# EAGLE board AirSensor_LoRA (EAGLE 9.6.2)
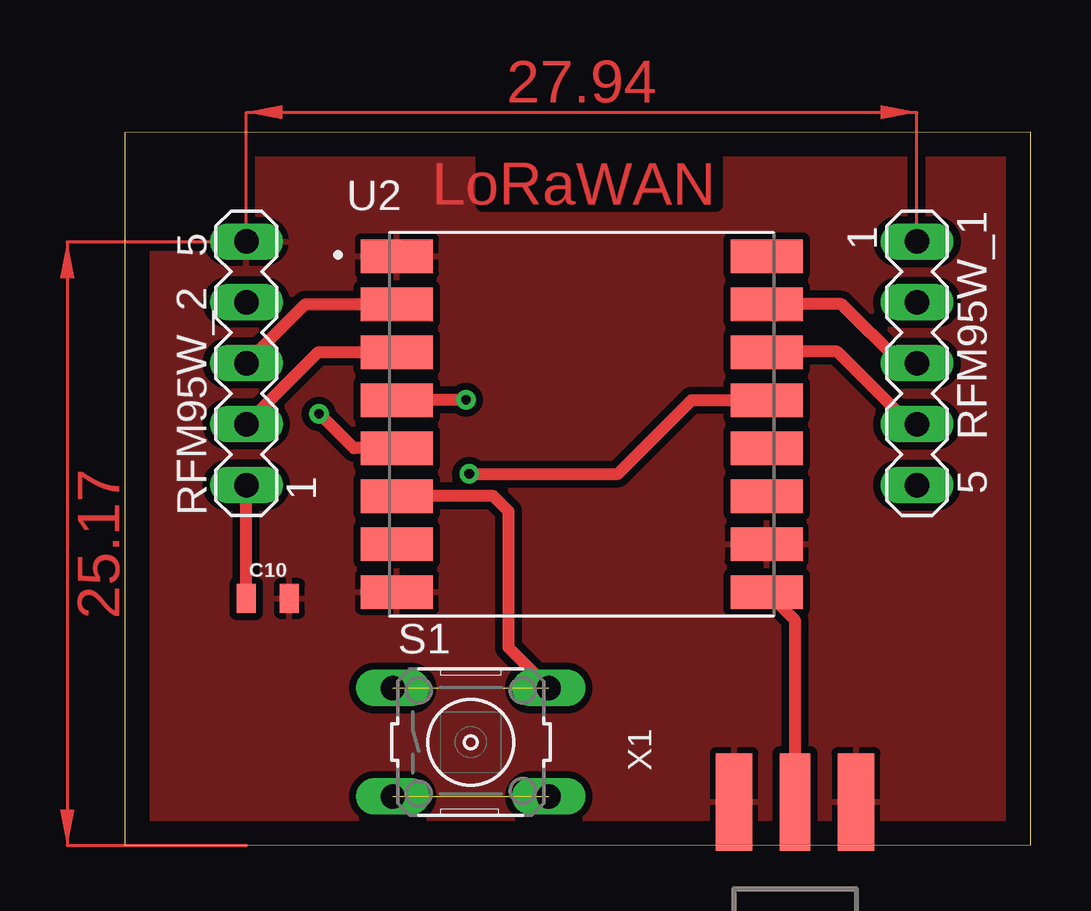
[diagram p0: board, top side]
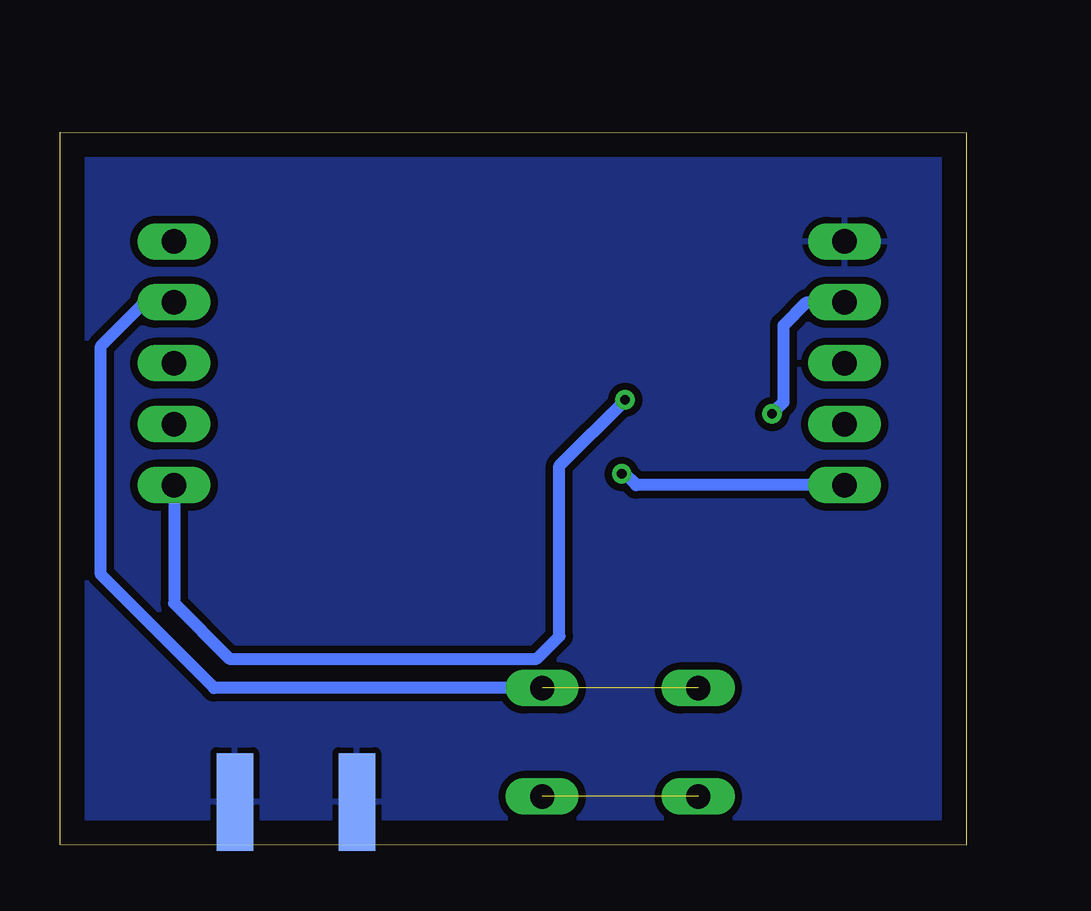
[diagram p1: board, bottom side, seen from below]

Size 37.77 x 29.73 mm. Coordinates in mm from the lower left corner, seen from the top.
Outline: 0,0 37.77,0.03 37.77,29.73 0,29.71 0,0
Copper layers (1*16): Top 0.035mm / dielectric 1.5mm / Bottom 0.035mm
Design rules "default": minimum track width 6mil, minimum drill 0.35mm, track to track 6mil, track to pad 6mil, pad to pad 6mil, via to via 6mil, smd to smd 6mil, copper to edge 40mil, drill to drill 6mil, minimum pad ring 10mil, minimum via ring 8mil, stop-mask expansion 4mil, vias tented up to drill 0mil, thermal gap 10mil

## Footprints (pad centres in the part's own frame; a part is rotated, then mirrored left to right if it is on the bottom)
0805 = smd 0.8 x 1.2: 1 -0.9,0; 2 0.9,0
MA05-1 = drill 1.016 long: 1 -5.08,0; 2 -2.54,0; 3 0,0; 4 2.54,0; 5 5.08,0
B3F-10XX = drill 1.016 long: 1 -3.251,2.261; 2 3.251,2.261; 3 -3.251,-2.261; 4 3.251,-2.261
XCVR_RFM95W-915S2 = smd 3 x 1.4: 1 -7.7,7; 2 -7.7,5; 3 -7.7,3; 4 -7.7,1; 5 -7.7,-1; 6 -7.7,-3; 7 -7.7,-5; 8 -7.7,-7; 9 7.7,-7; 10 7.7,-5; 11 7.7,-3; 12 7.7,-1; 13 7.7,1; 14 7.7,3; 15 7.7,5; 16 7.7,7
SMA_EDGELAUNCH = smd 4.064 x 1.524: GND@1 2.032,-2.54; GND@2 2.032,2.54 | smd 4.064 x 1.524 bottom: GND@3 2.032,2.54; GND@4 2.032,-2.54 | smd 4.064 x 1.27: P 2.032,0

## Placement (x,y rotation side)
C10  0.1uF  [0805]  5.97,10.29 0 top
RFM95W_1  LoRa_1  [MA05-1]  33.02,20.09 270 top
RFM95W_2  LoRa_2  [MA05-1]  5.08,20.09 90 top
S1  [B3F-10XX]  14.43,4.29 0 top
U2  RFM95W-915S2  [XCVR_RFM95W-915S2]  19.05,17.55 0 top
X1  [SMA_EDGELAUNCH]  27.94,-0.23 90 top

## Library data of the parts
C10 = SparkFun-Capacitors; PROD_ID: CAP-08064
RFM95W_1 RFM95W_2 = con-lstb; OC_FARNELL: unknown; OC_NEWARK: unknown
S1 = switch-omron; MPN: B3F-1000; OC_FARNELL: 176432; OC_NEWARK: 36M3542
U2 = RFM95W-915S2; AVAILABILITY: Warning; DESCRIPTION: General ISM < 1GHz LoRa™ Transceiver Module 915MHz Surface Mount; MF: RF Solutions; MP: RFM95W-915S2; PACKAGE: SMD-16 RF Solutions; PRICE: None; PURCHASE-URL: https://pricing.snapeda.com/search/part/RFM95W-915S2/?ref=eda
X1 = adafruit

## Nets
3.3V: S1.3 S1.4
GND: C10.2 RFM95W_2.5 U2.1 U2.8 U2.10 X1.GND@1 X1.GND@2 X1.GND@3 X1.GND@4
N$13: RFM95W_1.2 S1.1 S1.2 U2.6
N$17: C10.1 RFM95W_2.1 U2.13
N$18: RFM95W_2.2 U2.3
N$21: RFM95W_2.3 U2.2
N$22: RFM95W_2.4 U2.5
N$23: RFM95W_1.5 U2.4
N$24: RFM95W_1.4 U2.14
N$25: RFM95W_1.3 U2.15
N$26: U2.9 X1.P

## Tracks (layer width: path | path; a pad name or v marks a point on that pad's centre or on a via)
3.3V  (1 unrouted)
GND
  pour Top (isolate 0.305): 0.15,29.38 37.67,29.38 37.67,0.1 0.15,0.1
  pour Bottom (isolate 0.305): 0.28,29.39 37.67,29.39 37.67,0.1 0.28,0.1
N$13  (1 unrouted)
  Top 0.508: S1.2 16,8.23 16,13.92 15.37,14.55 U2.6
  Bottom 0.508: S1.2 31.34,6.55 36.07,11.28 36.07,20.8 34.24,22.63 RFM95W_1.2
N$17  (via drill 0.4)
  Top 0.508: C10.1 RFM95W_2.1 | v14.36,15.48 20.56,15.48 23.63,18.55 U2.13
  Bottom 0.508: RFM95W_2.1 13.77,15.01 14.3,15.54 v14.36,15.48
N$18
  Top 0.508: RFM95W_2.2 8.08,20.55 U2.3
N$21
  Top 0.508: RFM95W_2.3 7.54,22.55 U2.2
N$22  (via drill 0.4)
  Top 0.508: U2.5 9.56,16.55 8.13,17.98 v8.1,17.98
  Bottom 0.508: v8.1,17.98 7.62,18.47 7.62,21.67 6.66,22.63 RFM95W_2.4
N$23  (via drill 0.4)
  Top 0.508: v14.22,18.57 11.37,18.57 U2.4
  Bottom 0.508: RFM95W_1.5 33.02,10.08 30.71,7.77 17.91,7.77 16.97,8.71 16.97,15.82 v14.22,18.57
N$24
  Top 0.508: RFM95W_1.4 32.72,17.55 29.69,20.57 26.77,20.57 U2.14
N$25
  Top 0.508: RFM95W_1.3 32.33,20.09 29.87,22.56 U2.15
N$26
  Top 0.508: X1.P 27.94,9.36 U2.9
(copper drawn outside any net)
  shapes: Top area x2

## Text on the board
Top: LoRaWAN